# Altium PCB MainSensorV1.PcbDoc (part 3 of 3)
Units mm, origin at the board's own origin, x right, y up, seen from the top; angles counter-clockwise.
Board outline 100 x 40.64 mm, 2 copper layers (Top Layer, Bottom Layer); 164 components, 84 nets, 408 pads, 582 vias.
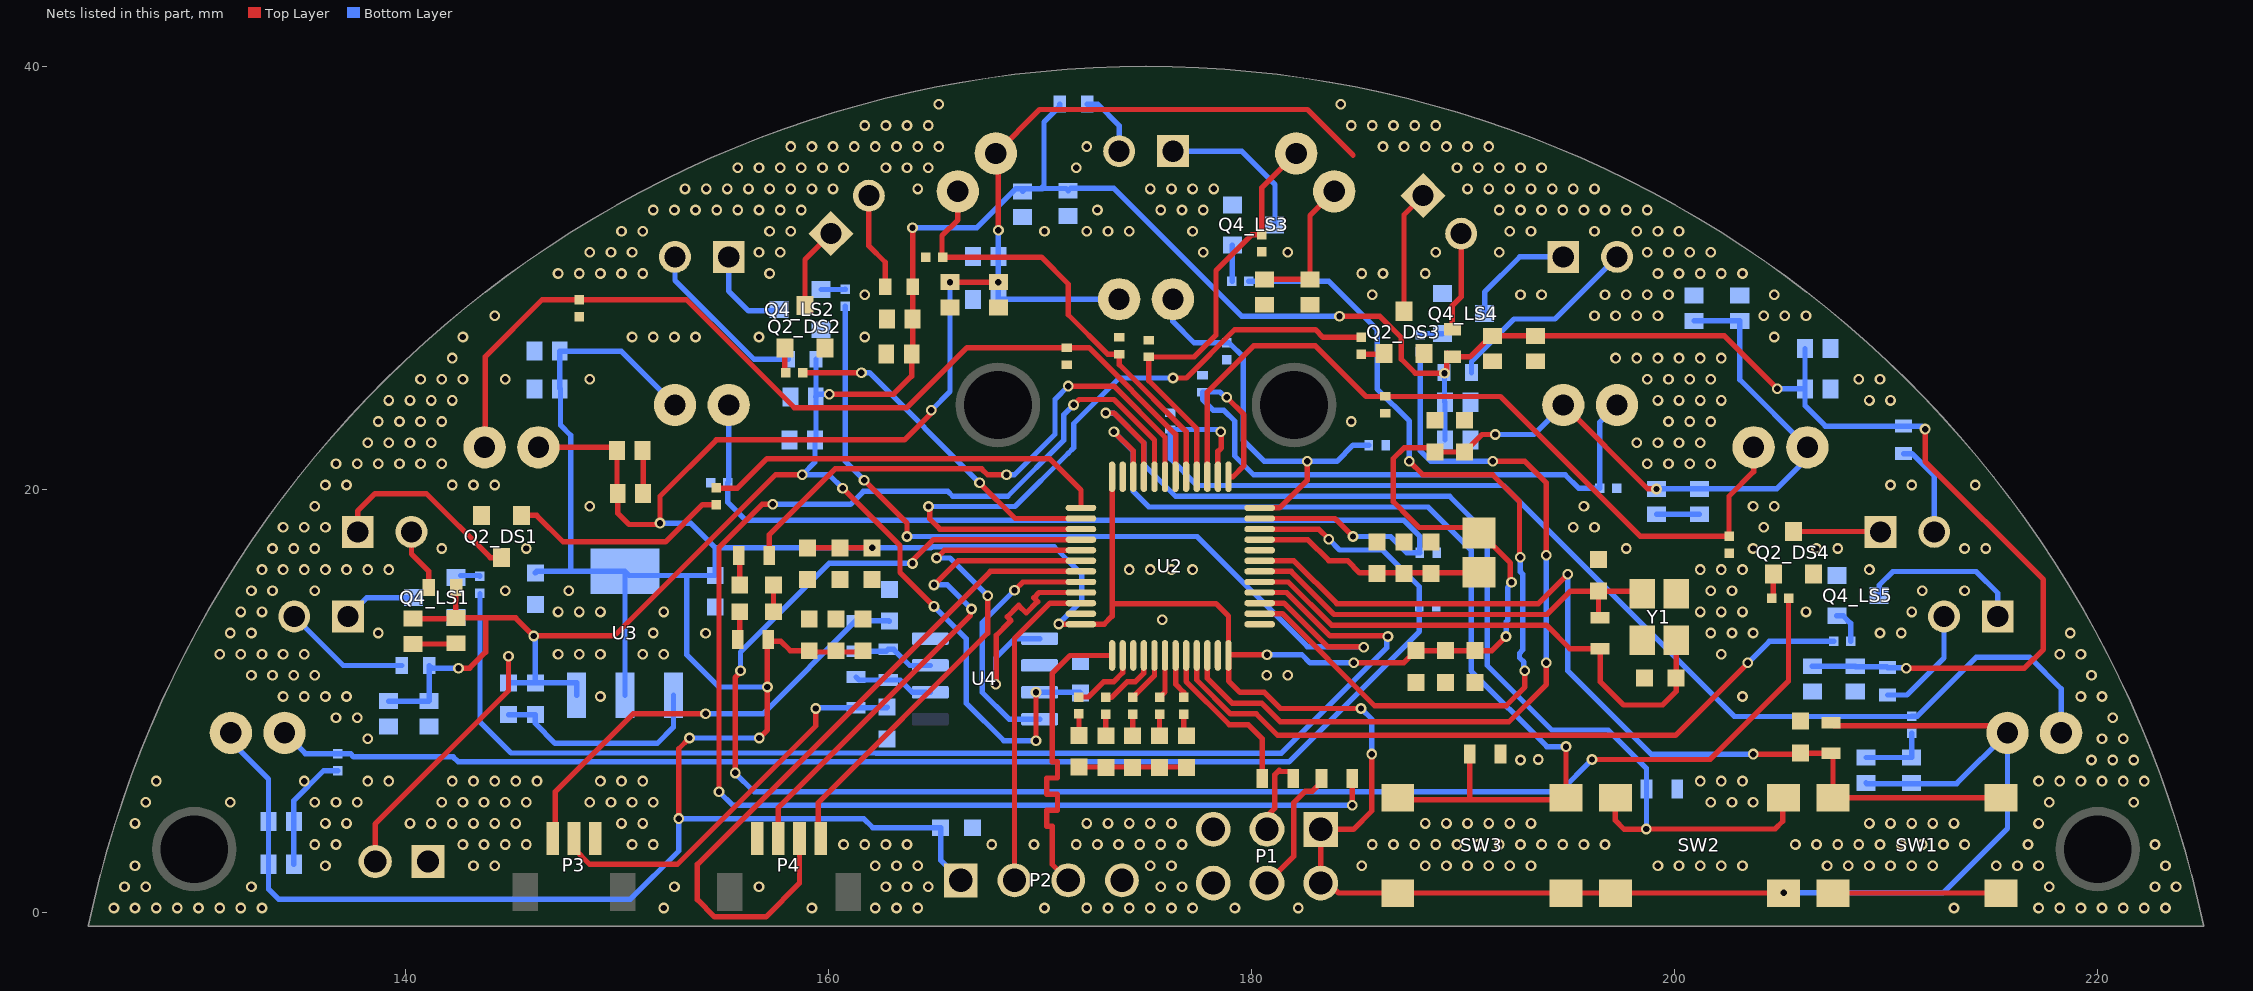
[diagram p2: the nets of this part, all layers, seen from the top]

## Via types
v1: diameter 0.508, hole 0.3, Top Layer to Bottom Layer, tented both sides, 562 vias
v2: diameter 0.508, hole 0.3, Top Layer to Bottom Layer, 20 vias

## Nets (pads, with @x,y where several pads share a name; then routed paths per layer and width w, separated by ;. In a path a pad name is that pad's centre, name@x,y a point inside that pad or via, vN(x,y) a via of type N, cw(c..) or ccw(c..) an arc to the next point about the centre after c; other vN are vias at no path point)
3V3: C3_DS1.1 C3_DS2.1 C3_DS3.1 C3_DS4.1 C4_DS1.1 C4_DS2.1 C4_DS3.1 C4_DS4.1 C8_LS1.1 C8_LS2.1 C8_LS3.1 C8_LS4.1 C8_LS5.1 C9_LS1.1 C9_LS2.1 C9_LS3.1 C9_LS4.1 C9_LS5.1 C16.2 C17.2 C18.2 C19.2 C20.2 C21.2 C22.2 C23.2 C24.2 C25.2 C26.2 C27.2 C33.2 C34.2 FB1.2 P1.1 P1.2 P2.1 Q1_DS1.2 Q1_DS2.2 Q1_DS3.2 Q1_DS4.2 Q3_LS1.2 Q3_LS2.2 Q3_LS3.2 Q3_LS4.2 Q3_LS5.2 R16.2 R18.2 SW2.A1 SW2.A2 SW3.A1 SW3.A2 U2.24 U2.36 U2.48 U3.2 U3.4 | length 351.2
  Top Layer w0.254: Q1_DS1.2@146.27,22 149.831,22 C3_DS1.1@149.987,21.844 C4_DS1.1@149.987,19.812 ; C4_DS1.1@150.022,19.812 150.022,18.888 150.558,18.351 151.956,18.351 v1(152.019,18.415) 152.019,19.685 154.686,22.352 163.576,22.352 164.973,23.749 v1(164.846,23.749) ; v2(152.908,4.445) 152.908,7.747 v2(153.416,8.255) ; v2(156.718,8.255) 157.099,8.636 v2(157.099,10.668) 157.099,12.805 157.077,12.827 157.734,12.827 158.179,12.382 C17.2@159.08,12.382 ; C26.2@159.004,17.248 C23.2@160.528,17.248 v1(162.052,17.248) ; C17.2@159.08,12.319 161.557,12.319 C21.2@161.62,12.382 ; v2(165.735,29.81) v2(168.021,29.81) ; v2(168.021,32.258) 168.021,35.775 Q1_DS2.2@167.898,35.898 169.973,37.973 182.626,37.973 184.785,35.814 ; v1(170.871,13.645) 170.877,13.639 171.918,13.639 U2.36@171.924,13.633 ; U2.36@171.937,13.633 173.018,13.633 173.399,14.014 173.399,14.605 ; U2.24@173.399,20.608 173.399,14.605 ; U2.48@178.899,12.158 178.908,12.149 178.908,10.957 179.451,10.414 180.594,10.414 181.356,9.652 v1(185.166,9.652) ; C4_DS3.1@180.594,29.937 C3_DS3.1@182.753,29.937 182.753,32.957 Q1_DS3.2@183.898,34.102 ; v1(180.721,12.192) 178.92,12.192 178.899,12.171 178.899,14.014 178.308,14.605 173.399,14.605 ; v1(184.819,11.811) 187.185,11.811 C25.2@187.757,12.383 191.352,12.383 v1(192.024,13.056) ; v1(185.674,7.493) 185.674,4.808 184.803,3.937 P1.1@183.261,3.937 P1.2@183.261,1.397 183.639,1.397 184.111,0.925 SW3.A2@186.906,0.925 SW3.A1@194.856,0.925 SW2.A2@197.193,0.925 SW2.A1@205.143,0.925 ; C22.2@188.671,21.78 C27.2@190.068,21.78 190.894,22.606 v1(191.516,22.606) ; C22.2@188.722,21.971 187.198,21.971 186.69,21.463 186.69,19.431 187.514,18.607 187.916,18.205 FB1.2@190.492,18.205 ; FB1.2@190.754,17.944 190.805,17.944 192.229,16.519 192.229,15.67 v1(192.278,15.621) ; Q3_LS4.2@194.73,24 194.753,24 198.722,20.031 v1(199.136,20.031) ; R18.2@207.391,8.98 207.539,8.832 215.398,8.832 Q3_LS5.2@215.73,8.5
  Bottom Layer w0.254: Q3_LS1.2@131.73,8.5 131.73,8.097 133.512,6.315 C9_LS1.1@133.512,4.318 C8_LS1.1@133.512,2.286 133.512,1.108 133.985,0.635 150.622,0.635 152.908,2.921 v2(152.908,4.445) 161.649,4.445 162.081,4.013 C16.2@165.29,4.013 165.29,2.477 P2.1@166.243,1.524 ; Q1_DS1.2@146.05,21.78 Q1_DS1.2@146.27,22 ; C34.2@146.126,16.066 146.198,16.138 147.8,16.138 ; U3.2@150.368,10.278 U3.4@150.368,16.138 ; v1(152.019,18.415) 153.471,18.415 154.638,17.248 v1(162.052,17.248) 164.83,17.248 164.879,17.297 170.663,17.297 171.958,16.002 171.958,14.732 v1(170.871,13.645) ; Q3_LS2.2@152.73,24 150.187,26.543 C9_LS2.1@147.285,26.543 147.285,24.8 147.32,24.765 147.32,23.05 147.8,22.57 147.8,16.138 ; v2(153.416,8.255) v2(156.718,8.255) ; 154.635,17.248 C33.2@154.635,15.939 153.285,15.939 ; v2(157.099,10.668) 154.813,10.668 153.285,12.196 153.285,15.939 ; v1(164.846,23.749) 165.735,24.638 v2(165.735,29.81) ; v2(168.021,32.258) C9_LS3.1@168.021,31.015 C8_LS3.1@168.021,28.983 168.038,29 Q3_LS3.2@173.73,29 ; v1(180.721,12.192) 182.372,12.192 182.753,11.811 v1(184.819,11.811) ; v1(185.166,9.652) 185.674,9.144 v1(185.674,7.493) ; v1(191.516,22.606) 193.336,22.606 Q3_LS4.2@194.73,24 ; v1(192.024,13.056) 192.024,13.743 192.098,13.818 192.098,15.373 192.278,15.552 v1(192.278,15.621) ; v1(199.136,20.031) C4_DS4.1@201.168,20.031 204.816,20.031 206.27,21.485 Q1_DS4.2@206.27,22 203.073,25.197 C9_LS4.1@203.073,27.975 C8_LS4.1@200.914,27.975 ; v1(205.15,0.934) 212.683,0.934 215.73,3.981 Q3_LS5.2@215.73,8.5 213.326,6.096 209.077,6.096 C9_LS5.1@209.042,6.131 ; 147.8,16.138 U3.4@150.368,16.138 ; U3.4@150.368,16.138 150.567,15.939 153.285,15.939
5V: C1_DS1.1 C1_DS2.1 C1_DS3.1 C1_DS4.1 C2_DS1.1 C2_DS2.1 C2_DS3.1 C2_DS4.1 C6_LS1.1 C6_LS2.1 C6_LS3.1 C6_LS4.1 C6_LS5.1 C7_LS1.1 C7_LS2.1 C7_LS3.1 C7_LS4.1 C7_LS5.1 C31.2 C32.2 C38.1 J2.2 R1_DS1.2 R1_DS2.2 R1_DS3.2 R1_DS4.2 R4_LS1.2 R4_LS2.2 R4_LS3.2 R4_LS4.2 R4_LS5.2 U3.3 U4.3 | length 182.5
  Top Layer w0.254: J2.2@138.557,2.413 138.557,4.191 144.856,10.49 v1(144.856,12.116) ; C2_DS1.1@140.335,13.9 142.332,13.9 C1_DS1.1@142.367,13.935 ; R1_DS1.2@142.382,15.367 142.367,15.352 C1_DS1.1@142.367,13.935 ; v1(142.494,11.557) 143.023,11.557 143.782,12.315 143.782,13.935 ; v1(158.75,20.701) 157.48,20.701 149.86,13.081 v1(146.05,13.081) 145.196,13.935 143.782,13.935 ; v1(160.02,24.511) 163.068,24.511 163.922,25.365 C1_DS2.1@163.922,26.416 163.972,26.466 R1_DS2.2@163.972,29.591 163.965,29.598 163.965,32.377 v2(163.957,32.385) ; v1(160.655,20.066) 163.367,17.354 163.367,16.084 v1(164.973,14.478) ; v1(169.799,8.128) v1(169.799,10.414) ; v1(184.15,28.194) 186.055,28.194 187.071,27.178 187.071,26.162 187.731,25.502 v1(189.113,25.502) 189.113,25.571 189.211,25.669 189.211,26.101 R1_DS3.2@189.384,26.274 ; R1_DS3.2@189.253,26.447 189.426,26.274 R1_DS3.2@189.484,26.274 190.318,26.274 191.314,27.27 C1_DS3.1@191.389,27.27 C2_DS3.1@193.421,27.27 202.346,27.27 v1(204.851,24.765) ; v2(210.947,11.557) 216.535,11.557 217.424,12.446 217.424,15.748 211.836,21.336 v1(211.836,22.86) ; C1_DS1.1@142.367,13.935 143.782,13.935
  Bottom Layer w0.254: C7_LS1.1@139.192,9.998 C6_LS1.1@141.097,9.998 141.112,10.013 R4_LS1.2@141.112,11.684 141.239,11.557 v1(142.494,11.557) ; v1(144.856,12.116) C31.2@144.856,10.859 C32.2@146.126,10.859 146.126,13.005 v1(146.05,13.081) ; C32.2@146.136,10.869 148.078,10.869 U3.3@148.078,10.278 ; C6_LS2.1@159.385,24.384 C6_LS2.1@159.4,24.399 ; C6_LS2.1@159.4,24.384 159.4,22.402 C7_LS2.1@159.35,22.352 159.35,21.301 v1(158.75,20.701) 160.02,20.701 v1(160.655,20.066) ; R4_LS2.2@159.4,26.162 C6_LS2.1@159.4,24.399 ; v1(160.02,24.511) 159.512,24.511 C6_LS2.1@159.4,24.399 ; v2(163.957,32.385) 167.005,32.385 168.84,34.22 169.164,34.22 C7_LS3.1@169.227,34.156 ; v1(164.973,14.478) 166.497,12.954 166.497,9.906 168.275,8.128 v1(169.799,8.128) ; C7_LS3.1@169.164,34.093 169.291,34.22 169.799,34.22 ; v1(169.799,10.414) 171.868,10.414 C38.1@171.907,10.375 ; 170.18,34.31 170.09,34.22 169.799,34.22 ; 170.198,34.237 171.214,34.237 C6_LS3.1@171.323,34.128 171.45,34.255 173.471,34.255 179.532,28.194 v1(184.15,28.194) ; R4_LS3.2@170.927,38.227 170.927,38.127 170.18,37.38 170.18,34.369 170.123,34.312 170.031,34.22 169.799,34.22 ; v1(189.113,25.502) 189.113,24.155 C7_LS4.1@189.138,24.13 C6_LS4.1@189.138,22.352 ; v1(204.851,24.765) C2_DS4.1@206.156,24.765 ; C1_DS4.1@206.156,26.67 C2_DS4.1@206.156,24.765 ; C7_LS5.1@206.502,11.649 C6_LS5.1@208.534,11.649 208.565,11.618 210.027,11.618 R4_LS5.2@210.058,11.587 210.073,11.572 210.932,11.572 v2(210.947,11.557) ; v1(211.836,22.86) 211.831,22.86 211.689,23.002 207.122,23.002 206.156,23.968 C2_DS4.1@206.156,24.765
BOOT0: R14.1 U2.44 | length 7.8
  Top Layer w0.254: U2.44@176.899,12.158 176.899,10.928 178.937,8.89 179.832,8.89 180.504,8.218 R14.1@180.504,6.35
BOOT1: R15.2 U2.20 | length 69.9
  Top Layer w0.254: v2(154.813,5.715) 154.813,17.272 156.845,19.304 v1(157.353,19.304) ; v1(171.577,24.003) 171.831,24.257 173.482,24.257 175.399,22.34 U2.20@175.399,20.608 ; v2(184.748,5.078) R15.2@184.748,6.35
  Bottom Layer w0.254: v2(154.813,5.715) 155.448,5.08 v2@184.748,5.08 ; v1(157.353,19.304) 161.028,19.304 161.638,19.914 165.633,19.914 165.862,19.685 168.462,19.685 171.106,22.329 171.106,23.532 v1(171.577,24.003)
GND: C1_DS1.2 C1_DS2.2 C1_DS3.2 C1_DS4.2 C2_DS1.2 C2_DS2.2 C2_DS3.2 C2_DS4.2 C3_DS1.2 C3_DS2.2 C3_DS3.2 C3_DS4.2 C4_DS1.2 C4_DS2.2 C4_DS3.2 C4_DS4.2 C5_DS1.1 C5_DS2.1 C5_DS3.1 C5_DS4.1 C6_LS1.2 C6_LS2.2 C6_LS3.2 C6_LS4.2 C6_LS5.2 C7_LS1.2 C7_LS2.2 C7_LS3.2 C7_LS4.2 C7_LS5.2 C8_LS1.2 C8_LS2.2 C8_LS3.2 C8_LS4.2 C8_LS5.2 C9_LS1.2 C9_LS2.2 C9_LS3.2 C9_LS4.2 C9_LS5.2 C10_LS1.1 C10_LS2.1 C10_LS3.1 C10_LS4.1 C10_LS5.1 C16.1 C17.1 C18.1 C19.1 C20.1 C21.1 C22.1 C23.1 C24.1 C25.1 C26.1 C27.1 C28.1 C29.1 C30.1 C31.1 C32.1 C33.1 C34.1 C35.2 C36.1 C37.2 C38.2 C39.1 C40.1 D5.1 D6.1 DS1_LS1.2 DS1_LS2.2 DS1_LS3.2 DS1_LS4.2 DS1_LS5.2 J2.1 P1.5 P1.6 P2.4 P3.1 P4.4 Q2_DS1.2 Q2_DS2.2 Q2_DS3.2 Q2_DS4.2 Q4_LS1.2 Q4_LS2.2 Q4_LS3.2 Q4_LS4.2 Q4_LS5.2 R3_DS1.2 R3_DS2.2 R3_DS3.2 R3_DS4.2 R6_LS1.2 R6_LS2.2 R6_LS3.2 R6_LS4.2 R6_LS5.2 R23.2 R24.2 SW1.A1 SW1.A2 U2.8 U2.23 U2.35 U2.47 U3.1 U4.2 U4.8 Y1.2 Y1.4 | length 39.9
  Top Layer w0.254: C2_DS1.2@140.335,12.7 142.332,12.7 C1_DS1.2@142.367,12.735 ; C3_DS1.2@151.187,21.844 151.222,21.809 C4_DS1.2@151.222,19.812 ; D5.1@157.391,14.224 D6.1@157.391,15.494 ; DS1_LS5.2@171.831,6.882 176.892,6.882 DS1_LS1.2@176.911,6.863 ; SW1.A2@207.48,0.925 SW1.A1@215.43,0.925
  Bottom Layer w0.254: C8_LS1.2@134.712,2.286 C9_LS1.2@134.712,4.318 134.712,5.299 136.125,6.712 R6_LS1.2@136.779,6.712 ; C31.1@144.856,9.359 C32.1@146.126,9.359 146.126,8.941 147.066,8.001 151.892,8.001 152.658,8.767 U3.1@152.658,10.278 ; C3_DS4.2@199.136,18.831 C4_DS4.2@201.168,18.831 ; C9_LS5.2@209.042,7.331 C8_LS5.2@211.201,7.331 R6_LS5.2@211.201,8.49
  other v1: 126.203,0.217 127.203,0.217 128.203,0.217 129.203,0.217 130.203,0.217 131.203,0.217 132.203,0.217 133.203,0.217 152.203,0.217 159.203,0.217 162.203,0.217 163.203,0.217 164.203,0.217 170.203,0.217 172.203,0.217 173.203,0.217 174.203,0.217 175.203,0.217 176.203,0.217 177.203,0.217 179.203,0.217 182.203,0.217 213.203,0.217 217.203,0.217 218.203,0.217 219.203,0.217 220.203,0.217 221.203,0.217 222.203,0.217 223.203,0.217 126.703,1.217 127.703,1.217 132.703,1.217 152.703,1.217 156.703,1.217 162.703,1.217 163.703,1.217 164.703,1.217 175.703,1.217 176.703,1.217 217.703,1.217 222.703,1.217 223.703,1.217 127.203,2.217 136.203,2.217 143.203,2.217 144.203,2.217 162.203,2.217 163.203,2.217 164.203,2.217 175.203,2.217 176.203,2.217 185.203,2.217 188.203,2.217 189.203,2.217 190.203,2.217 191.203,2.217 192.203,2.217 193.203,2.217 199.203,2.217 200.203,2.217 201.203,2.217 202.203,2.217 203.203,2.217 207.203,2.217 208.203,2.217 209.203,2.217 210.203,2.217 211.203,2.217 212.203,2.217 215.203,2.217 216.203,2.217 217.203,2.217 223.203,2.217 135.703,3.217 136.703,3.217 142.703,3.217 143.703,3.217 144.703,3.217 145.703,3.217 150.703,3.217 151.703,3.217 160.703,3.217 161.703,3.217 162.703,3.217 163.703,3.217 167.703,3.217 169.703,3.217 171.703,3.217 172.703,3.217 173.703,3.217 174.703,3.217 175.703,3.217 176.703,3.217 185.703,3.217 186.703,3.217 187.703,3.217 188.703,3.217 189.703,3.217 190.703,3.217 191.703,3.217 192.703,3.217 193.703,3.217 194.703,3.217 195.703,3.217 196.703,3.217 205.703,3.217 206.703,3.217 207.703,3.217 208.703,3.217 209.703,3.217 210.703,3.217 211.703,3.217 212.703,3.217 213.703,3.217 216.703,3.217 222.703,3.217 127.203,4.217 136.203,4.217 137.203,4.217 140.203,4.217 141.203,4.217 142.203,4.217 143.203,4.217 144.203,4.217 145.203,4.217 150.203,4.217 151.203,4.217 172.203,4.217 173.203,4.217 174.203,4.217 175.203,4.217 176.203,4.217 188.203,4.217 189.203,4.217 190.203,4.217 191.203,4.217 192.203,4.217 193.203,4.217 209.203,4.217 210.203,4.217 211.203,4.217 212.203,4.217 213.203,4.217 217.203,4.217 127.703,5.217 131.703,5.217 135.703,5.217 136.703,5.217 137.703,5.217 141.703,5.217 142.703,5.217 143.703,5.217 144.703,5.217 145.703,5.217 148.703,5.217 149.703,5.217 150.703,5.217 151.703,5.217 201.703,5.217 202.703,5.217 203.703,5.217 217.703,5.217 221.703,5.217 128.203,6.217 135.203,6.217 138.203,6.217 139.203,6.217 142.203,6.217 143.203,6.217 144.203,6.217 145.203,6.217 146.203,6.217 149.203,6.217 150.203,6.217 151.203,6.217 201.203,6.217 202.203,6.217 203.203,6.217 217.203,6.217 218.203,6.217 219.203,6.217 220.203,6.217 221.203,6.217 222.203,6.217 192.703,7.217 219.703,7.217 220.703,7.217 221.703,7.217 193.548,7.239 138.203,8.217 220.203,8.217 221.203,8.217 136.703,9.217 137.703,9.217 220.703,9.217 134.203,10.217 135.203,10.217 136.203,10.217 137.203,10.217 149.203,10.217 203.203,10.217 219.203,10.217 220.203,10.217 132.703,11.217 133.703,11.217 134.703,11.217 135.703,11.217 180.703,11.217 181.703,11.217 219.703,11.217 131.203,12.217 132.203,12.217 133.203,12.217 134.203,12.217 135.203,12.217 147.203,12.217 148.203,12.217 149.203,12.217 151.203,12.217 152.203,12.217 202.203,12.217 218.203,12.217 219.203,12.217 131.703,13.217 132.703,13.217 138.703,13.217 151.703,13.217 154.178,13.208 201.703,13.217 202.703,13.217 203.703,13.217 209.703,13.217 210.703,13.217 218.703,13.217 175.768,13.843 132.203,14.217 133.203,14.217 147.203,14.217 148.203,14.217 149.203,14.217 152.203,14.217 201.203,14.217 202.203,14.217 203.203,14.217 206.203,14.217 211.203,14.217 132.703,15.217 133.703,15.217 135.703,15.217 144.703,15.217 147.703,15.217 201.703,15.217 202.703,15.217 211.703,15.217 213.703,15.217 133.203,16.217 134.203,16.217 135.203,16.217 136.203,16.217 137.203,16.217 138.203,16.217 139.203,16.217 174.203,16.217 175.203,16.217 176.203,16.217 177.203,16.217 201.203,16.217 202.203,16.217 203.203,16.217 209.203,16.217 133.703,17.217 134.703,17.217 135.703,17.217 141.703,17.217 145.703,17.217 197.703,17.217 203.703,17.217 206.703,17.217 207.703,17.217 213.703,17.217 214.703,17.217 134.203,18.217 135.203,18.217 136.203,18.217 195.203,18.217 196.203,18.217 204.203,18.217 135.703,19.217 148.703,19.217 195.703,19.217 203.703,19.217 204.703,19.217 136.203,20.217 137.203,20.217 142.203,20.217 143.203,20.217 144.203,20.217 210.203,20.217 211.203,20.217 214.203,20.217 136.703,21.217 137.703,21.217 138.703,21.217 139.703,21.217 140.703,21.217 141.703,21.217 198.703,21.217 199.703,21.217 200.703,21.217 201.703,21.217 138.203,22.217 139.203,22.217 140.203,22.217 141.203,22.217 198.203,22.217 199.203,22.217 200.203,22.217 201.203,22.217 138.703,23.217 139.703,23.217 140.703,23.217 141.703,23.217 184.703,23.217 199.703,23.217 200.703,23.217 201.703,23.217 139.203,24.217 140.203,24.217 141.203,24.217 142.203,24.217 199.203,24.217 200.203,24.217 201.203,24.217 202.203,24.217 209.203,24.217 210.203,24.217 140.703,25.217 141.703,25.217 142.703,25.217 144.703,25.217 148.703,25.217 198.703,25.217 199.703,25.217 200.703,25.217 201.703,25.217 208.703,25.217 209.703,25.217 142.203,26.217 197.203,26.217 198.203,26.217 199.203,26.217 200.203,26.217 201.203,26.217 202.203,26.217 142.703,27.217 150.703,27.217 151.703,27.217 152.703,27.217 153.703,27.217 156.703,27.217 161.703,27.217 204.703,27.217 144.203,28.217 196.203,28.217 197.203,28.217 198.203,28.217 199.203,28.217 204.203,28.217 205.203,28.217 206.203,28.217 161.703,29.217 185.703,29.217 192.703,29.217 193.703,29.217 196.703,29.217 197.703,29.217 198.703,29.217 199.703,29.217 204.703,29.217 147.203,30.217 148.203,30.217 149.203,30.217 150.203,30.217 151.203,30.217 157.203,30.217 185.203,30.217 186.203,30.217 188.203,30.217 199.203,30.217 200.203,30.217 201.203,30.217 202.203,30.217 203.203,30.217 148.703,31.217 149.703,31.217 150.703,31.217 156.703,31.217 157.703,31.217 177.703,31.217 181.703,31.217 188.703,31.217 191.703,31.217 198.703,31.217 199.703,31.217 200.703,31.217 201.703,31.217 150.203,32.217 151.203,32.217 157.203,32.217 158.203,32.217 170.203,32.217 172.203,32.217 173.203,32.217 174.203,32.217 177.203,32.217 192.203,32.217 193.203,32.217 196.203,32.217 198.203,32.217 199.203,32.217 200.203,32.217 151.703,33.217 152.703,33.217 153.703,33.217 154.703,33.217 155.703,33.217 156.703,33.217 157.703,33.217 158.703,33.217 172.703,33.217 175.703,33.217 176.703,33.217 177.703,33.217 191.703,33.217 192.703,33.217 193.703,33.217 194.703,33.217 195.703,33.217 196.703,33.217 197.703,33.217 198.703,33.217 153.203,34.217 154.203,34.217 155.203,34.217 156.203,34.217 157.203,34.217 158.203,34.217 159.203,34.217 160.203,34.217 164.203,34.217 175.203,34.217 176.203,34.217 177.203,34.217 178.203,34.217 190.203,34.217 191.203,34.217 192.203,34.217 193.203,34.217 194.203,34.217 195.203,34.217 196.203,34.217 155.703,35.217 156.703,35.217 157.703,35.217 158.703,35.217 159.703,35.217 160.703,35.217 162.703,35.217 163.703,35.217 164.703,35.217 171.703,35.217 189.703,35.217 190.703,35.217 191.703,35.217 192.703,35.217 193.703,35.217 158.203,36.217 159.203,36.217 160.203,36.217 161.203,36.217 162.203,36.217 163.203,36.217 164.203,36.217 165.203,36.217 172.203,36.217 186.203,36.217 187.203,36.217 188.203,36.217 189.203,36.217 190.203,36.217 191.203,36.217 161.703,37.217 162.703,37.217 163.703,37.217 164.703,37.217 184.703,37.217 185.703,37.217 186.703,37.217 187.703,37.217 188.703,37.217 165.203,38.217 184.203,38.217
NetC5_DS1_2: C5_DS1.2 Q1_DS1.1 R3_DS1.1 U2.18 | length 45
  Top Layer w0.254: Q1_DS1.1@143.73,22 143.764,22.034 143.764,26.289 146.45,28.975 R3_DS1.1@148.209,28.975 153.27,28.975 158.369,23.876 163.703,23.876 166.535,26.708 C5_DS1.2@171.25,26.708 172.301,26.708 176.399,22.61 U2.18@176.399,20.608
NetC5_DS2_2: C5_DS2.2 Q1_DS2.1 R3_DS2.1 U2.17 | length 21.6
  Top Layer w0.254: Q1_DS2.1@166.102,34.102 166.102,32.752 165.354,32.004 165.354,31.026 R3_DS2.1@165.392,30.988 170.053,30.988 171.323,29.718 171.323,28.267 173.193,26.397 C5_DS2.2@173.736,26.397 173.736,26.3 173.736,25.908 176.899,22.745 U2.17@176.899,20.608
NetC5_DS3_2: C5_DS3.2 Q1_DS3.1 R3_DS3.1 U2.16 | length 20.6
  Top Layer w0.254: U2.16@177.399,20.608 177.399,21.848 177.399,22.88 175.133,25.146 C5_DS3.2@175.133,26.27 177.273,26.27 178.308,27.305 178.308,30.353 179.997,32.042 R3_DS3.1@180.467,32.042 180.467,34.263 Q1_DS3.1@182.102,35.898
NetC5_DS4_2: C5_DS4.2 Q1_DS4.1 R3_DS4.1 U2.15 | length 38
  Top Layer w0.254: U2.15@177.899,20.608 177.899,21.922 177.899,22.005 177.899,24.61 178.689,25.4 180.086,26.797 183.007,26.797 185.401,24.403 C5_DS4.2@186.309,24.403 191.751,24.403 198.355,17.799 R3_DS4.1@202.565,17.799 202.565,19.685 203.73,20.85 Q1_DS4.1@203.73,22
NetC10_LS1_2: C10_LS1.2 Q3_LS1.1 R6_LS1.1 U2.10 | length 67.6
  Top Layer w0.254: U2.10@180.374,18.133 183.162,18.133 v1(183.642,17.653)
  Bottom Layer w0.254: Q3_LS1.1@134.27,8.5 135.258,7.512 R6_LS1.1@136.779,7.512 137.395,7.512 137.541,7.366 138.303,7.366 142.24,7.366 142.469,7.137 162.072,7.137 162.079,7.13 181.755,7.13 187.922,13.297 C10_LS1.2@187.922,14.478 187.922,15.405 186.182,17.145 184.15,17.145 v1(183.642,17.653)
NetC10_LS2_2: C10_LS2.2 Q3_LS2.1 R6_LS2.1 U2.11 | length 46.9
  Top Layer w0.254: U2.11@180.374,18.633 181.387,18.633 183.932,18.633 v1(184.785,17.78)
  Bottom Layer w0.254: Q3_LS2.1@155.27,24 155.27,20.358 R6_LS2.1@155.232,20.32 155.232,19.393 156.083,18.542 187.198,18.542 187.941,17.799 C10_LS2.2@187.941,17.145 ; v1(184.785,17.78) 186.563,17.78 187.325,17.018 C10_LS2.2@187.941,17.018
NetC10_LS3_2: C10_LS3.2 Q3_LS3.1 R6_LS3.1 U2.12 | length 19.4
  Top Layer w0.254: U2.12@180.374,19.133 181.312,19.133 182.626,20.447 v1(182.626,21.336)
  Bottom Layer w0.254: Q3_LS3.1@176.27,29 176.27,27.946 177.273,26.943 R6_LS3.1@178.816,26.943 178.924,26.943 179.603,26.264 179.603,22.327 180.594,21.336 v1(182.626,21.336) 184.023,21.336 184.785,22.098 C10_LS3.2@185.528,22.098
NetC10_LS4_2: C10_LS4.2 Q3_LS4.1 R6_LS4.1 U2.13 | length 31.8
  Top Layer w0.254: v1(178.816,24.365) 179.628,23.553 179.628,21.132 179.104,20.608 U2.13@178.899,20.608
  Bottom Layer w0.254: C10_LS4.2@177.723,24.6 C10_LS4.2@177.673,24.6 177.673,24.257 178.181,23.749 178.689,23.749 179.197,23.241 179.197,21.59 180.086,20.701 194.818,20.701 195.453,20.066 R6_LS4.1@196.45,20.066 196.45,23.18 Q3_LS4.1@197.27,24 ; C10_LS4.2@177.796,24.611 178.501,24.611 178.747,24.365 v1(178.816,24.365)
NetC10_LS5_2: C10_LS5.2 Q3_LS5.1 R6_LS5.1 U2.14 | length 56.9
  Top Layer w0.254: U2.14@178.399,20.608 178.399,21.808 178.562,21.971 178.562,22.733 v1(178.537,22.733)
  Bottom Layer w0.254: v1(178.537,22.733) 178.429,22.841 C10_LS5.2@176.149,22.841 176.149,21.463 177.419,20.193 191.897,20.193 202.819,9.271 R6_LS5.1@211.099,9.271 ; R6_LS5.1@211.201,9.29 211.474,9.29 214.249,12.065 216.789,12.065 218.27,10.584 Q3_LS5.1@218.27,8.5
NetC28_2: C28.2 C29.2 C30.2 FB1.1 U2.9 | length 11
  Top Layer w0.254: U2.9@180.374,17.633 182.646,17.633 183.642,16.637 184.531,16.637 185.103,16.065 185.369,16.065 185.928,16.065 186.893,16.065 188.417,16.065 190.726,16.065 FB1.1@190.754,16.092
NetC39_2: C39.2 P3.2 R22.1 | length 19.1
  Top Layer w0.254: P3.2@147.955,3.503 147.955,3.028 148.697,2.286 152.841,2.286 159.385,8.83 v2(159.385,9.652)
  Bottom Layer w0.254: v2(159.385,9.652) 159.422,9.689 R22.1@161.29,9.689 162.736,9.689 C39.2@162.763,9.716
NetC40_2: C40.2 P3.3 R20.1 | length 21.4
  Top Layer w0.254: P3.3@146.955,3.503 147.074,3.622 147.074,5.723 150.749,9.398 v2(154.178,9.398)
  Bottom Layer w0.254: v2(154.178,9.398) 156.882,9.398 R20.1@161.29,13.806 162.838,13.806 C40.2@162.865,13.779
NetD1_DS1_A: D1_DS1.A R1_DS1.1 | length 3
  Top Layer w0.254: D1_DS1.A@140.27,18 140.27,16.956 141.082,16.144 R1_DS1.1@141.082,15.367
NetD1_DS1_C: D1_DS1.C Q2_DS1.3 | length 9.4
  Top Layer w0.254: D1_DS1.C@137.73,18 137.73,18.985 138.557,19.812 140.97,19.812 144.002,16.78 Q2_DS1.3@144.526,16.78
NetD1_DS2_A: D1_DS2.A R1_DS2.1 | length 4.6
  Top Layer w0.254: D1_DS2.A@161.898,33.898 161.898,31.523 162.672,30.749 R1_DS2.1@162.672,29.591
NetD1_DS2_C: D1_DS2.C Q2_DS2.3 | length 3.9
  Top Layer w0.254: Q2_DS2.3@158.877,28.702 158.877,30.877 D1_DS2.C@160.102,32.102
NetD1_DS3_A: D1_DS3.A R1_DS3.1 | length 4.7
  Top Layer w0.254: R1_DS3.1@189.484,27.574 189.484,28.702 189.898,29.116 D1_DS3.A@189.898,32.102
NetD1_DS3_C: D1_DS3.C Q2_DS3.3 | length 5.8
  Top Layer w0.254: Q2_DS3.3@187.198,28.432 187.198,32.994 D1_DS3.C@188.102,33.898
NetD1_DS4_A: D1_DS4.A R1_DS4.1 | length 4.5
  Bottom Layer w0.254: R1_DS4.1@210.82,21.702 211.216,21.702 212.27,20.648 D1_DS4.A@212.27,18
NetD1_DS4_C: D1_DS4.C Q2_DS4.3 | length 4.1
  Top Layer w0.254: Q2_DS4.3@205.613,18.018 209.712,18.018 D1_DS4.C@209.73,18
NetD2_LS1_A: D2_LS1.A R4_LS1.1 | length 6
  Bottom Layer w0.254: D2_LS1.A@134.73,14 137.046,11.684 R4_LS1.1@139.812,11.684
NetD2_LS1_C: D2_LS1.C Q4_LS1.3 | length 3.5
  Bottom Layer w0.254: D2_LS1.C@137.27,14 138.162,14.892 Q4_LS1.3@140.374,14.892
NetD2_LS2_A: D2_LS2.A R4_LS2.1 | length 8
  Bottom Layer w0.254: D2_LS2.A@152.73,31 152.73,29.896 156.464,26.162 R4_LS2.1@158.1,26.162
NetD2_LS2_C: D2_LS2.C Q4_LS2.3 | length 4.4
  Bottom Layer w0.254: D2_LS2.C@155.27,31 155.27,29.388 156.21,28.448 157.578,28.448 Q4_LS2.3@157.639,28.509
NetD2_LS3_A: D2_LS3.A R4_LS3.1 | length 3.1
  Bottom Layer w0.254: R4_LS3.1@172.227,38.227 172.72,38.227 173.73,37.217 D2_LS3.A@173.73,36
NetD2_LS3_C: D2_LS3.C Q4_LS3.3 | length 7.4
  Bottom Layer w0.254: D2_LS3.C@176.27,36 179.519,36 181.102,34.417 181.102,32.528 Q4_LS3.3@181.086,32.512
NetD2_LS4_A: D2_LS4.A R4_LS4.1 | length 9.5
  Bottom Layer w0.254: R4_LS4.1@190.388,25.527 190.388,26.05 192.405,28.067 194.337,28.067 D2_LS4.A@197.27,31
NetD2_LS4_C: D2_LS4.C Q4_LS4.3 | length 5.4
  Bottom Layer w0.254: Q4_LS4.3@191.008,28.321 191.008,29.337 192.671,31 D2_LS4.C@194.73,31
NetD2_LS5_A: D2_LS5.A R4_LS5.1 | length 5.4
  Bottom Layer w0.254: R4_LS5.1@210.058,10.287 210.975,10.287 211.455,10.767 212.73,12.042 D2_LS5.A@212.73,14
NetD2_LS5_C: D2_LS5.C Q4_LS5.3 | length 7.9
  Bottom Layer w0.254: Q4_LS5.3@209.661,14.986 209.661,15.478 210.312,16.129 214.249,16.129 215.27,15.108 D2_LS5.C@215.27,14
NetD5_2: D5.2 R16.1 | length 1.3
  Top Layer w0.254: R16.1@155.698,12.913 155.791,13.006 D5.2@155.791,14.224
NetD6_2: D6.2 R17.1 | length 1
  Top Layer w0.254: D6.2@155.791,15.494 R17.1@155.791,16.529
NetDS1_LS1_1: DS1_LS1.1 R7_LS1.2 | length 1.1
  Top Layer w0.254: R7_LS1.2@176.784,9.379 176.784,8.49 DS1_LS1.1@176.911,8.363
NetDS1_LS2_1: DS1_LS2.1 R7_LS2.2 | length 1
  Top Layer w0.254: DS1_LS2.1@175.641,8.363 R7_LS2.2@175.641,9.372
NetDS1_LS3_1: DS1_LS3.1 R7_LS3.2 | length 1
  Top Layer w0.254: DS1_LS3.1@174.371,8.363 R7_LS3.2@174.371,9.372
NetDS1_LS4_1: DS1_LS4.1 R7_LS4.2 | length 1
  Top Layer w0.254: DS1_LS4.1@173.101,8.363 R7_LS4.2@173.101,9.372
NetDS1_LS5_1: DS1_LS5.1 R7_LS5.2 | length 1
  Top Layer w0.254: DS1_LS5.1@171.831,8.382 R7_LS5.2@171.831,9.391
NetP1_3: P1.3 R14.2 | length 3.9
  Top Layer w0.254: P1.3@180.721,3.937 180.721,4.572 181.09,4.941 181.09,6.523 181.298,6.731 181.356,6.673 181.806,6.673 181.954,6.525 R14.2@181.954,6.35
NetP1_4: P1.4 R15.1 | length 6.2
  Top Layer w0.254: P1.4@180.721,1.397 181.991,2.667 181.991,5.207 182.515,5.731 182.854,5.731 183.298,6.175 R15.1@183.298,6.35
NetP4_1: P4.1 U2.29 | length 24.9
  Top Layer w0.254: P4.1@159.496,3.503 159.512,3.519 159.512,5.207 167.513,13.208 v1(167.513,14.986) ; v1(165.1,16.764) 165.469,17.133 169.938,17.133 U2.29@171.924,17.133
  Bottom Layer w0.254: v1(165.1,16.764) 165.735,16.764 v1(167.513,14.986)
NetP4_2: P4.2 U2.31 | length 33.5
  Top Layer w0.254: P4.2@158.615,3.503 158.615,1.389 157.025,-0.201 154.599,-0.201 153.789,0.609 153.789,2.278 167.644,16.133 U2.31@171.924,16.133
NetP4_3: P4.3 U2.30 | length 24.3
  Top Layer w0.254: P4.3@157.615,3.503 157.615,4.961 166.702,14.048 166.702,14.302 v1(166.751,14.351) ; v1(164.973,15.494) 166.112,16.633 U2.30@171.924,16.633
  Bottom Layer w0.254: v1(164.973,15.494) 165.608,15.494 v1(166.751,14.351)
NetQ2_DS1_1: Q2_DS1.1 R2_DS1.1 | length 10.5
  Top Layer w0.254: Q2_DS1.1@145.476,18.78 146.193,18.78 147.447,17.526 152.273,17.526 154.032,19.285 R2_DS1.1@154.686,19.285
NetQ2_DS2_1: Q2_DS2.1 R2_DS2.1 | length 1.2
  Top Layer w0.254: Q2_DS2.1@157.927,26.702 157.927,25.569 R2_DS2.1@157.969,25.527
NetQ2_DS3_1: Q2_DS3.1 R2_DS3.1 | length 1.1
  Top Layer w0.254: R2_DS3.1@185.166,26.397 186.213,26.397 Q2_DS3.1@186.248,26.432
NetQ2_DS4_1: Q2_DS4.1 R2_DS4.1 | length 1.2
  Top Layer w0.254: R2_DS4.1@204.578,14.859 204.663,14.944 Q2_DS4.1@204.663,16.018
NetQ4_LS1_1: Q4_LS1.1 R5_LS1.1 | length 0.9
  Bottom Layer w0.254: Q4_LS1.1@142.605,15.936 R5_LS1.1@143.51,15.936
NetQ4_LS2_1: Q4_LS2.1 R5_LS2.1 | length 1.1
  Bottom Layer w0.254: Q4_LS2.1@159.639,29.459 160.777,29.459 R5_LS2.1@160.782,29.464
NetQ4_LS3_1: Q4_LS3.1 R5_LS3.1 | length 1.7
  Bottom Layer w0.254: R5_LS3.1@179.07,29.845 179.086,29.861 Q4_LS3.1@179.086,31.562
NetQ4_LS4_1: Q4_LS4.1 R5_LS4.1 | length 1.1
  Bottom Layer w0.254: R5_LS4.1@187.96,27.324 188.007,27.371 Q4_LS4.1@189.008,27.371
NetQ4_LS5_1: Q4_LS5.1 R5_LS5.1 | length 1.7
  Bottom Layer w0.254: Q4_LS5.1@207.661,14.036 207.96,14.036 208.318,13.678 R5_LS5.1@208.318,12.827
NetR2_DS1_2: R2_DS1.2 U2.25 | length 19.2
  Top Layer w0.254: R2_DS1.2@154.784,20.066 155.688,20.066 157.085,21.463 170.434,21.463 171.924,19.973 U2.25@171.924,19.133
NetR2_DS2_2: R2_DS2.2 U2.26 | length 16
  Top Layer w0.254: R2_DS2.2@158.769,25.527 v1(161.544,25.527) ; v1(167.132,20.32) 168.819,18.633 U2.26@171.924,18.633
  Bottom Layer w0.254: v1(161.544,25.527) 161.925,25.527 v1(167.132,20.32)
NetR2_DS3_2: R2_DS3.2 U2.27 | length 32.6
  Top Layer w0.254: v1(164.719,19.202) 164.768,19.154 164.768,18.62 165.255,18.133 U2.27@171.924,18.133 ; v1(176.276,25.273) 176.911,25.273 179.197,27.559 183.007,27.559 183.369,27.197 R2_DS3.2@185.039,27.197
  Bottom Layer w0.254: v1(164.719,19.202) 166.671,19.202 168.808,19.202 171.323,21.717 171.577,21.971 171.577,23.114 173.736,25.273 v1(176.276,25.273)
NetR2_DS4_2: R2_DS4.2 U2.28 | length 80.4
  Top Layer w0.254: v2(155.575,6.604) 155.575,11.107 155.829,11.361 v2(155.829,11.43) ; v1(163.957,16.51) 163.957,16.637 164.953,17.633 U2.28@171.924,17.633 ; v2(196.088,7.239) 201.676,7.239 205.378,10.941 R2_DS4.2@205.378,14.859
  Bottom Layer w0.254: v2(155.575,6.604) 156.464,5.715 194.564,5.715 v2(196.088,7.239) ; v2(155.829,11.43) 155.829,12.319 160.02,16.51 v1(163.957,16.51)
NetR5_LS1_2: R5_LS1.2 U2.4 | length 59.1
  Top Layer w0.254: U2.4@180.374,15.133 181.65,15.133 183.702,13.081 186.411,13.081 v1(186.436,13.056)
  Bottom Layer w0.254: R5_LS1.2@143.51,15.071 143.51,9.017 144.983,7.544 162.24,7.544 162.247,7.537 181.4,7.537 186.387,12.524 186.387,13.007 v1(186.436,13.056)
NetR5_LS2_2: R5_LS2.2 U2.3 | length 41.6
  Top Layer w0.254: v1(161.671,20.447) 163.702,18.416 163.702,17.783 v1(163.703,17.781) ; U2.3@180.374,14.633 181.522,14.633 183.582,12.573 185.268,12.573 v1(185.293,12.548)
  Bottom Layer w0.254: R5_LS2.2@160.782,28.664 160.782,21.336 v1(161.671,20.447) ; v1(163.703,17.781) 163.704,17.78 177.419,17.78 182.626,12.573 185.268,12.573 v1(185.293,12.548)
NetR5_LS3_2: R5_LS3.2 U2.2 | length 43.6
  Top Layer w0.254: U2.2@180.374,14.133 181.447,14.133 185.801,9.779 192.024,9.779 192.913,10.668 v1(192.913,11.43) ; v1(187.452,21.336) 188.087,20.701 191.389,20.701 192.659,19.431 192.659,16.837 v1(192.7,16.796)
  Bottom Layer w0.254: R5_LS3.2@179.851,29.845 183.642,29.845 185.928,27.559 185.928,24.765 187.452,23.241 v1(187.452,21.336) ; v1(192.7,16.796) 192.7,16.119 192.811,16.008 192.811,12.413 192.659,12.261 192.659,12.05 192.864,11.845 192.864,11.479 v1(192.913,11.43)
NetR5_LS4_2: R5_LS4.2 U2.46 | length 39.5
  Top Layer w0.254: U2.46@177.899,12.158 177.899,11.077 179.07,9.906 180.467,9.906 181.356,9.017 192.151,9.017 193.929,10.795 v1(193.929,11.811) ; v1(191.389,21.336) 192.913,21.336 193.929,20.32 v1(193.929,16.891)
  Bottom Layer w0.254: R5_LS4.2@187.96,26.524 187.96,21.844 188.468,21.336 v1(191.389,21.336) ; v1(193.929,11.811) v1(193.929,16.891)
NetR5_LS5_2: R5_LS5.2 U2.45 | length 34.2
  Top Layer w0.254: U2.45@177.399,12.158 177.399,11.002 179.003,9.398 180.213,9.398 181.229,8.382 200.025,8.382 v2(203.454,11.811)
  Bottom Layer w0.254: v2(203.454,11.811) 204.47,12.827 R5_LS5.2@207.518,12.827
NetR7_LS1_1: R7_LS1.1 U2.43 | length 2.1
  Top Layer w0.254: U2.43@176.399,12.158 176.399,10.799 176.784,10.414 R7_LS1.1@176.784,10.179
NetR7_LS2_1: R7_LS2.1 U2.42 | length 2.1
  Top Layer w0.254: R7_LS2.1@175.641,10.172 175.899,10.43 U2.42@175.899,12.158
NetR7_LS3_1: R7_LS3.1 U2.41 | length 2.4
  Top Layer w0.254: R7_LS3.1@174.371,10.172 175.399,11.2 U2.41@175.399,12.158
NetR7_LS4_1: R7_LS4.1 U2.40 | length 3.1
  Top Layer w0.254: R7_LS4.1@173.101,10.172 173.367,10.172 174.117,10.922 174.498,10.922 174.899,11.323 U2.40@174.899,12.158
NetR7_LS5_1: R7_LS5.1 U2.38 | length 3.4
  Top Layer w0.254: R7_LS5.1@171.831,10.191 172.275,10.191 173.006,10.922 173.482,10.922 173.899,11.339 U2.38@173.899,12.158
NetR20_2: R20.2 R21.2 U4.7 | length 3.9
  Bottom Layer w0.254: R20.2@161.29,12.356 162.724,12.356 R21.2@162.814,12.446 163.068,12.446 163.83,11.684 U4.7@164.801,11.684
NetR21_1: R21.1 R22.2 U4.6 | length 3.8
  Bottom Layer w0.254: R22.2@161.29,11.139 161.433,10.996 R21.1@162.814,10.996 163.375,10.996 163.957,10.414 U4.6@164.801,10.414
NetR23_1: R23.1 SW2.B1 SW2.B2 U2.21 | length 54.1
  Top Layer w0.254: v1(173.101,23.622) 173.482,23.622 174.899,22.205 U2.21@174.899,20.608 ; SW2.B2@197.193,5.425 197.193,4.356 197.612,3.937 198.628,3.937 v2(198.647,3.956) 204.743,3.956 205.105,4.318 205.105,5.387 SW2.B1@205.143,5.425
  Bottom Layer w0.254: v1(173.101,23.622) 173.106,23.617 173.487,23.617 174.894,22.21 174.894,21.194 176.403,19.685 189.357,19.685 191.135,17.907 191.135,11.684 194.183,8.636 196.85,8.636 198.665,6.821 R23.1@198.665,5.842 198.665,3.974 v2(198.647,3.956)
NetR24_1: R24.1 SW3.B1 SW3.B2 U2.22 | length 47.1
  Top Layer w0.254: v1(173.482,22.733) 174.399,21.816 U2.22@174.399,20.608 ; SW3.B2@186.906,5.425 186.997,5.334 190.314,5.334 ; R24.1@190.314,7.493 190.314,5.334 ; v2(194.856,7.849) SW3.B1@194.856,5.425 194.765,5.334 190.314,5.334
  Bottom Layer w0.254: v1(173.482,22.733) 174.387,21.828 174.387,19.923 175.133,19.177 188.341,19.177 190.373,17.145 190.373,11.43 193.954,7.849 v2(194.856,7.849)
NetU2_1: U2.1
NetU2_32: U2.32 U4.4 | length 12
  Top Layer w0.254: v1(168.783,15.24) 169.176,15.633 U2.32@171.924,15.633
  Bottom Layer w0.254: v1(168.783,15.24) 167.259,13.716 167.259,10.414 168.529,9.144 U4.4@169.971,9.144
NetU2_33: U2.33 U4.1 | length 11.9
  Top Layer w0.254: v1(167.894,10.795) 167.919,10.82 167.919,13.106 168.529,13.716 168.619,13.806 168.439,13.985 168.978,14.524 169.337,14.165 169.876,14.704 169.696,14.883 169.946,15.133 170.16,15.133 U2.33@171.924,15.133
  Bottom Layer w0.254: v1(167.894,10.795) 167.894,12.031 168.817,12.954 U4.1@169.971,12.954
NetU2_39: U2.39
OSCIN: C35.1 R19.2 U2.5 Y1.3 | length 25.7
  Top Layer w0.254: U2.5@180.374,15.633 181.725,15.633 183.769,13.589 193.929,13.589 195.035,12.483 R19.2@196.469,12.483 196.469,10.922 197.573,9.818 199.429,9.818 200.064,10.453 C35.1@200.064,11.1 Y1.3@200.063,12.87
OSCOUT: C37.1 R19.1 U2.6 Y1.1 | length 20.7
  Top Layer w0.254: U2.6@180.374,16.133 181.86,16.133 183.896,14.097 193.964,14.097 195.068,15.201 C37.1@196.393,15.201 ; R19.1@196.469,13.933 196.393,14.009 C37.1@196.393,15.201 ; Y1.1@198.463,15.07 198.332,15.201 C37.1@196.393,15.201
PB1: R17.2 U2.19 | length 26.7
  Top Layer w0.254: R17.2@157.189,16.891 157.189,17.87 160.299,20.98 167.226,20.98 167.505,20.701 v1(168.402,20.701) ; v1(171.323,24.892) 173.482,24.892 175.899,22.475 U2.19@175.899,20.608
  Bottom Layer w0.254: v1(168.402,20.701) 168.783,20.701 170.7,22.618 170.7,24.269 v1(171.323,24.892)
RESET: C36.2 R18.1 SW1.B1 SW1.B2 U2.7 | length 44.8
  Top Layer w0.254: U2.7@180.374,16.633 181.995,16.633 184.023,14.605 193.548,14.605 v1(194.945,16.002) ; v2(203.708,7.493) 205.88,7.493 C36.2@205.943,7.556 ; C36.2@205.994,7.53 R18.1@207.391,7.53 207.441,7.53 207.467,7.556 207.48,7.543 SW1.B2@207.48,5.425 SW1.B1@215.43,5.425
  Bottom Layer w0.254: v1(194.945,16.002) 194.945,11.43 198.882,7.493 v2(203.708,7.493)
SWCLK: P2.3 U2.37 | length 15.3
  Top Layer w0.254: P2.3@171.323,1.524 170.561,2.286 170.561,3.953 170.561,4.08 170.307,4.08 170.307,4.842 170.815,4.842 170.815,5.604 170.307,5.604 170.307,6.366 170.815,6.366 170.815,7.128 170.561,7.128 170.561,7.324 170.561,11.303 171.416,12.158 U2.37@173.399,12.158
SWDIO: P2.2 U2.34 | length 15.3
  Top Layer w0.254: P2.2@168.783,1.524 168.783,12.954 170.462,14.633 U2.34@171.924,14.633
pads on no net: P3.MP1 P3.MP2 P4.MP1 P4.MP2 Scr1.13 Scr2.13 Scr3.13 Scr4.13 U4.5

## Polygon pours and split planes (outlines as drawn)
GND on Top Layer "GND_L01_P000" (solid, remove dead copper, pour order 0): 224.917,-0.635 224.917,40.005 124.968,40.005 124.968,-0.635
GND on Bottom Layer "GND_L02_P002" (solid, remove dead copper, pour order 2): 224.947,-0.583 224.947,40.057 124.998,40.057 124.998,-0.583

## Keep-outs
Keep-Out Layer:
  the board outline again, w0.254

## Silkscreen, mask and mechanical layers (free items; w line width, h text height)
Top Overlay:
  lines w0.127: 136.107,5.813 136.107,7.844 136.117,7.854 136.117,7.86 ; 136.107,7.854 136.112,7.86 143.507,7.86 143.507,5.813 ; 152.003,5.793 144.658,5.793 144.658,5.811 144.658,7.858 152.055,7.858 ; 152.056,5.813 152.056,7.857 ; 163.35,7.841 153.459,7.841 153.459,5.94 163.359,5.94 163.359,7.841
  lines w0.154: 179.268,8.89 186.309,8.89 ; 181.864,7.366 181.864,10.541 ; 184.277,7.366 184.277,10.541 ; 179.197,7.366 186.309,7.366 186.309,10.541 179.197,10.541 179.197,7.366
  lines w0.203: 164.823,2.869 164.823,4.826 166.197,4.826 175.283,4.826 175.283,2.869
  lines w0.254: 139.012,15.05 139.012,22.097 ; 145.004,19.05 145.004,26.097 ; 158.404,35.658 163.117,30.945 ; 164.211,8.509 170.942,8.509 170.942,5.969 ; 164.338,37.592 169.051,32.879 ; 178.207,5.282 178.207,8.763 179.204,8.763 ; 180.914,32.914 185.727,37.728 ; 186.956,30.873 191.77,35.687 ; 205.054,19.056 205.054,26.035 ; 210.924,15.051 210.924,22.098
  text "STM32F103C8T6" at 173.085,15.936 h0.6
  text "LED TEST" at 148.971,15.162 h1
  text "LED 3V3" at 148.98,13.716 h1
  text "BOOT OPTION" at 179.185,10.575 h1
  text "BT0" at 182.217,9.463 h1
  text "3V3" at 184.533,9.463 h1
  text "GND" at 179.517,9.459 h1
  text "SENSOR LED" at 164.248,8.763 h1
  text "CAN" at 144.576,7.866 h1
  text "POWER" at 136.107,7.86 h1
  text "USART" at 153.438,7.858 h1
  text "3V3" at 184.533,7.812 h1
  text "GND" at 179.517,7.808 h1
  text "BT1" at 182.268,7.806 h1
  text "UP" at 186.284,6.732 h1
  text "DOWN" at 198.095,6.605 h1
  text "RESET" at 208.763,6.605 h1
  text "HIGH" at 144.873,6.538 h1
  text "LOW" at 147.455,6.538 h1
  text "GND" at 149.926,6.538 h1
  text "RX" at 155.067,6.477 h1
  text "TX" at 157.734,6.477 h1
  text "CK" at 160.147,6.477 h1
  text "5V" at 137.541,6.362 h1
  text "GND" at 140.589,6.362 h1
  text "SWD" at 164.719,4.828 h1
  text "3V3" at 165.483,3.494 h1
  text "DIO" at 168.039,3.49 h1
  text "CLK" at 170.427,3.49 h1
  text "GND" at 172.913,3.49 h1
Bottom Overlay:
  text "." at 174.906,35.882 h1
  text "." at 153.906,30.882 h1
  text "." at 195.906,30.882 h1
  text "." at 174.916,28.882 h1
  text "." at 153.916,23.882 h1
  text "." at 195.916,23.882 h1
  text "MAIN SENSOR V1" at 182.753,18.058 h2
  text "." at 135.906,13.882 h1
  text "." at 213.906,13.882 h1
  text "TJA1050" at 168.277,13.569 h1 r90
  text "AMS1117 3v3" at 153.718,11.658 h1
  text "." at 132.916,8.382 h1
  text "." at 216.916,8.382 h1
Top Solder:
  text "RYA" at 171.45,31.496 h4

## Text inside footprints (layer, text, board x,y; h text height)
D5: Top Overlay "+" at 154.305,14.478 h0.76 r270
D6: Top Overlay "+" at 154.305,15.748 h0.76 r270
P1: Top Overlay "6" at 176.451,1.767 h1.02 r180; Top Overlay "5" at 176.451,4.467 h1.02 r180; Top Overlay "2" at 185.691,1.767 h1.02 r180; Top Overlay "1" at 185.391,4.467 h1.02 r180